# Altium PCB PCB3.PcbDoc
Units mm, origin at the board's own origin, x right, y up, seen from the top; angles counter-clockwise.
Board outline 30 x 22.5 mm, 2 copper layers (Top Layer, Bottom Layer); 20 components, 13 nets, 57 pads, 3 vias.
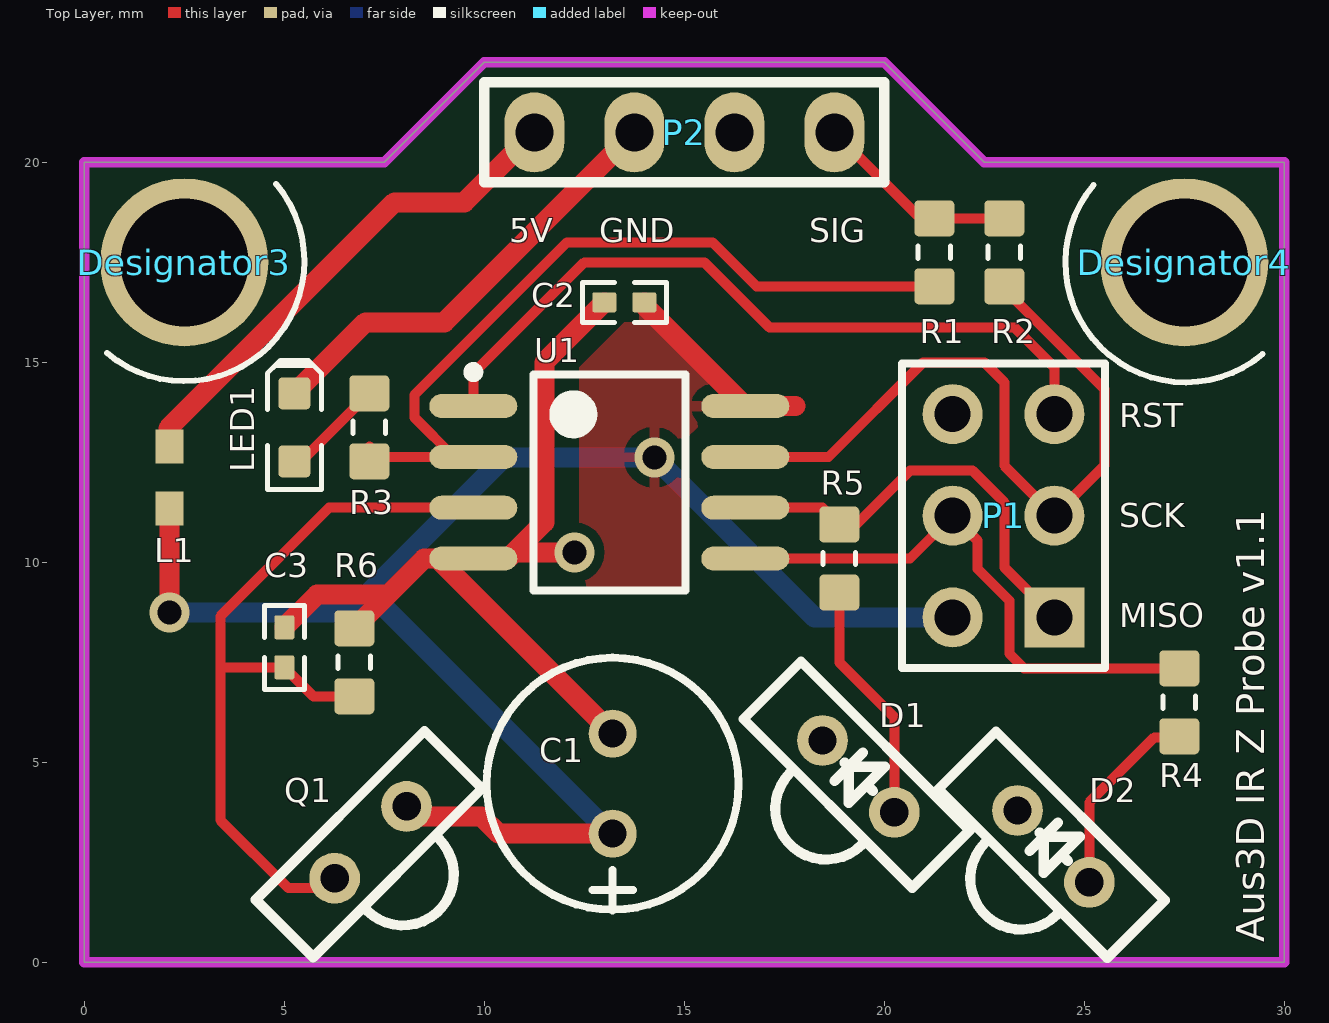
[diagram p0: Top Layer view]
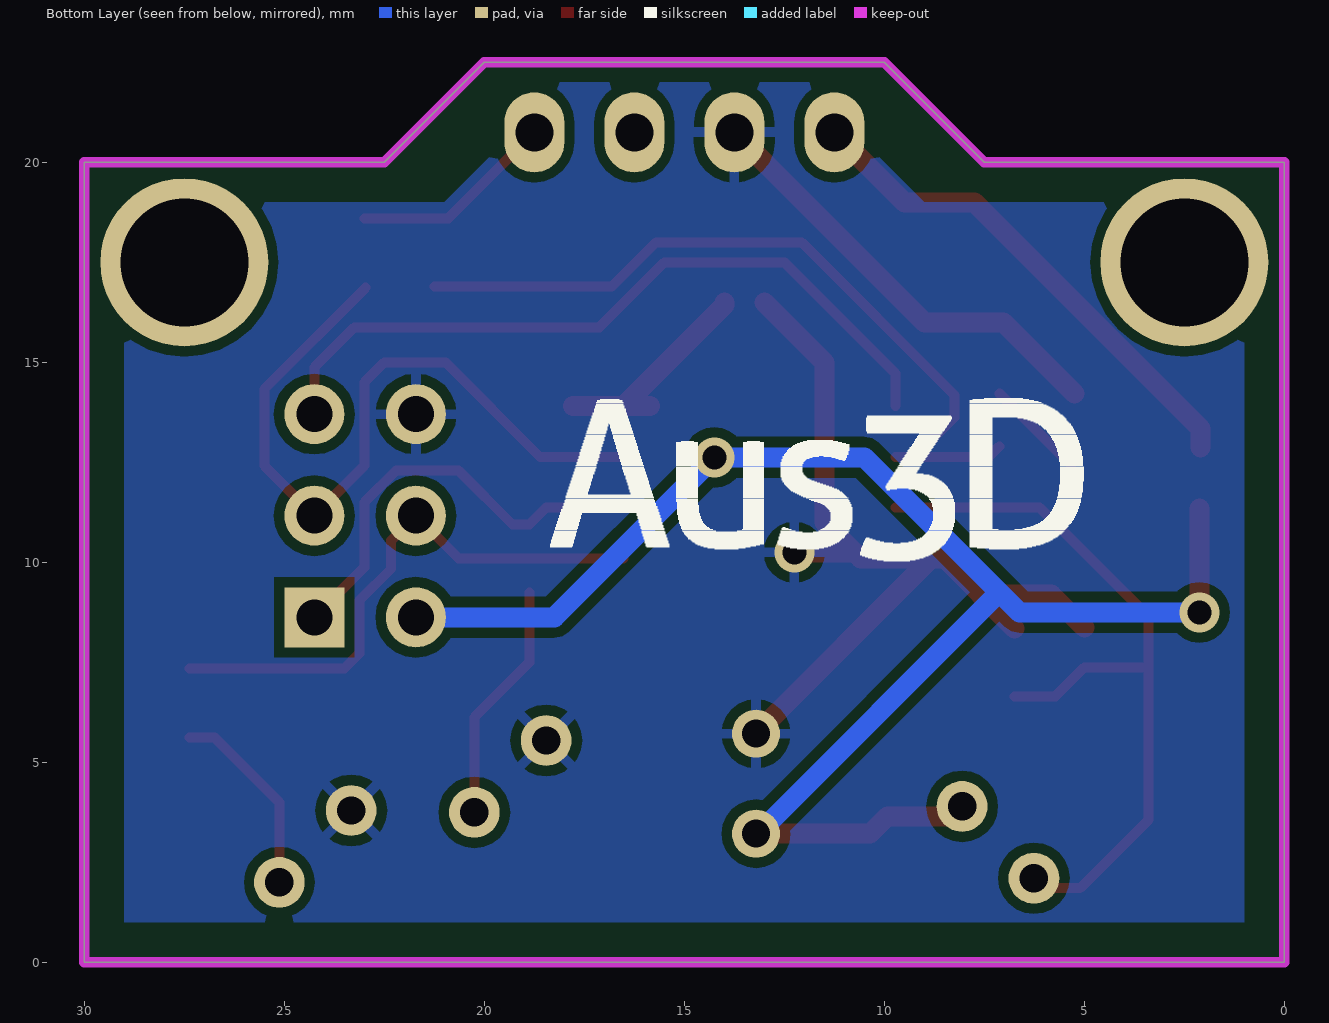
[diagram p1: Bottom Layer view, seen from below]
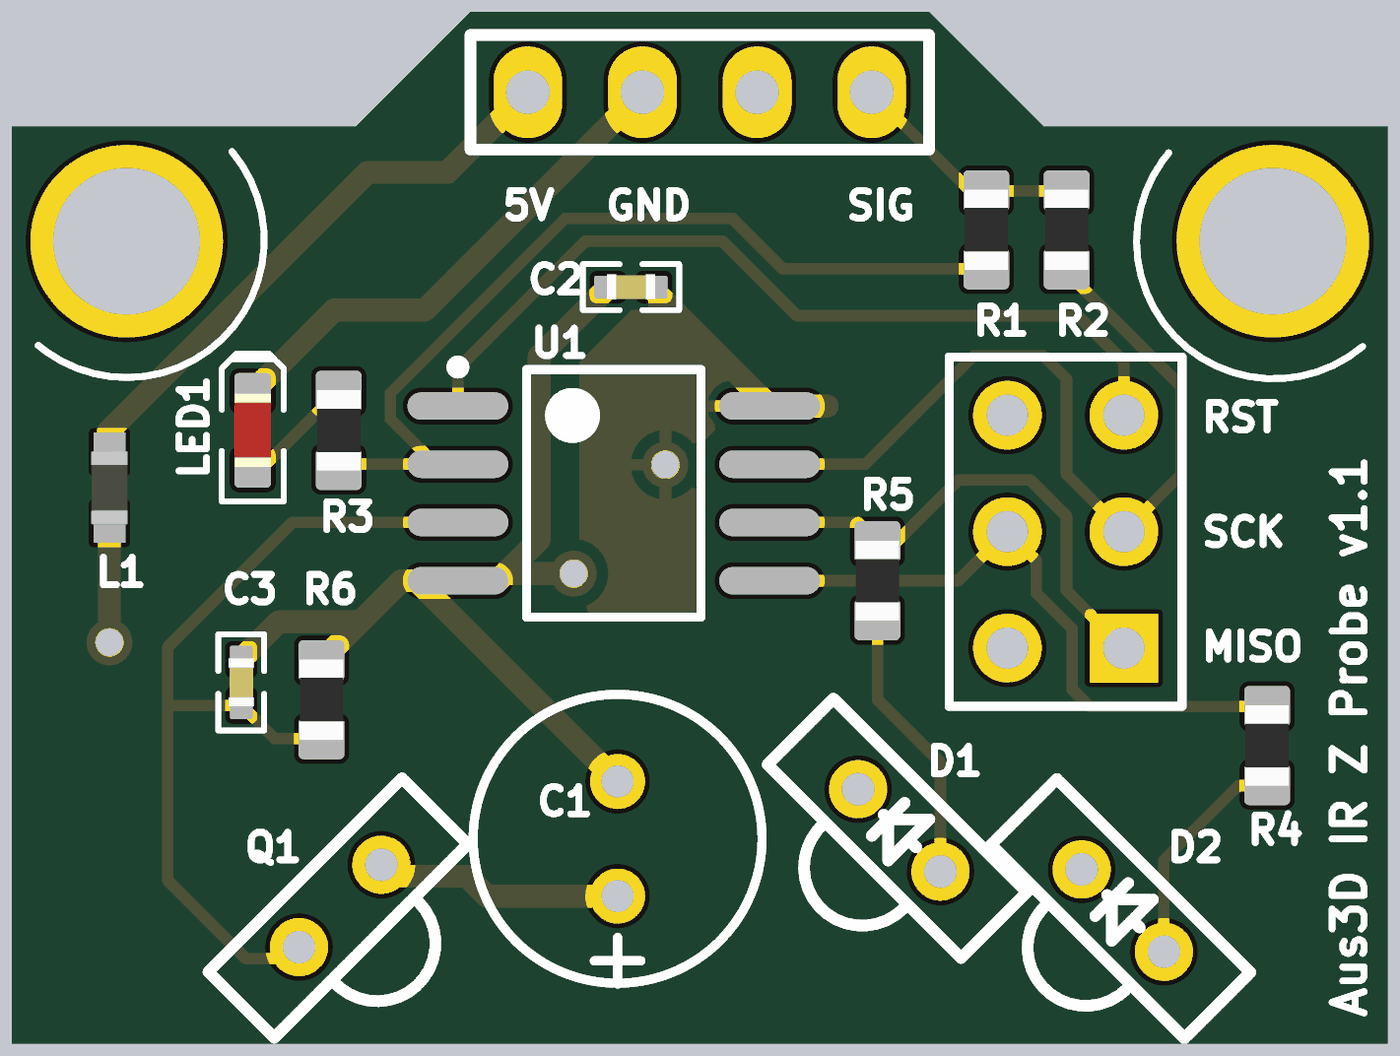
[diagram p2: 3D render of the assembled board from above, using the file's embedded part models]

## Layer stack, top to bottom
Top Solder: solder mask 0.0102, Solder Resist, Dk 3.5
Top Layer: signal copper 0.0356
Dielectric1: dielectric 0.32, FR-4, Dk 4.8
Bottom Layer: signal copper 0.0356
Bottom Solder: solder mask 0.0102, Solder Resist, Dk 3.5

## Board outline
0,0 0,20 7.5,20 10,22.5 20,22.5 22.5,20 30,20 30,0 0,0

## Design rules (kind name [scope] priority, off if disabled: settings)
Clearance [All] p1: gap=0.25
FabricationTestPointUsage TestPointUsage [All] p1: valid=0 allowmultiple=FALSE
FabricationTestpoint Testpoint [All] p1: side=3 testpointundercomponent=TRUE minsize=1.016 maxsize=2.54 preferedsize=1.524 minholesize=0 maxholesize=1.016 preferedholesize=0.813 testpointgrid=0.025 allowsidetop=TRUE allowsidebottom=TRUE usegrid=TRUE gridtolerance=0
PolygonConnect [All] p1: connectstyle=Relief reliefconductorwidth=0.254 reliefentries=4 polygonreliefangle="90 Angle" airgapwidth=0.254
RoutingVias [All] p1: holewidth=0.6 width=1 viastyle="Through Hole" minholewidth=0.6 minwidth=1 maxholewidth=0.6 maxwidth=1
SilkToSolderMaskClearance SilkscreenOverComponentPads [IsPad] p1: minsilkscreentomaskgap=0.254 clearancetoexposedcopper=TRUE
SolderMaskExpansion [All] p1: expansion=0.102
Width Width_Power [(InNet('5V') OR InNet('GND') OR InNet('VCC'))] p1: maxlimit=0.5 minlimit=0.25 preferedwidth=0.5 minimp=50.000000 maximp=50.000000 favimp=50.000000
Width [All] p2: maxlimit=0.25 minlimit=0.2 preferedwidth=0.25 minimp=50.000000 maximp=50.000000 favimp=50.000000
27 further rules are at their usual default settings.

## Classes and differential pairs
component class board1: C1 C2 C3 D1 D2 L1 LED1 P1 P2 Q1 R1 R2 R3 R4 R5 R6 U1

## Components (designator, comment, footprint, x,y, rotation, side; value= is the part's Value field where it differs from the comment)
C1 "100µ" 6.3-DIA-CAP 13.208,5.715 r270 top
C2 "100n" CAPC1005X55N 13.5,16.5 r0 top
C3 "1n" CAPC1005X55N 5,7.875 r90 top
D1 "GL480E" LED-2.54spacing 20.25,3.75 r135 top
D2 "GL480E" LED-2.54spacing 25.125,2 r135 top
Designator3 "Comment" M3-Hole 2.5,17.5 r0 top
Designator4 "Comment" M3-Hole 27.5,17.5 r270 top
L1 "7447965" SMD-0603 2.125,12.125 r270 top
LED1 "Red" LED-0603-RED 5.25,13.375 r90 top
P1 "ICSP" HDR2X3 24.25,8.625 r90 top
P2 "Header 4" JST-4P 18.75,20.75 r180 top
Q1 "SFH3100F" SFH3100F-footprint 8.056,3.898 r225 top
R1 "Thick Film" RESC1608X55N 21.25,17.75 r270 top
R2 "Thick Film" RESC1608X55N 23,17.75 r270 top
R3 "Thick Film" RESC1608X55N 7.125,13.375 r90 top
R4 "Thick Film" RESC1608X55N 27.375,6.5 r90 top
R5 "Thick Film" RESC1608X55N 18.875,10.095 r90 top
R6 "Thick Film" RESC1608X55N 6.75,7.5 r270 top
U1 "ATtiny45-20SH" 8S2_N 13.125,12 r0 top
? "" AUS3D-LOGO-BACK 12,11.875 r0 top

## Footprints (in the part's own frame and the unit in brackets; to place one, negate y for a bottom-side part, rotate by r counter-clockwise, add the part's x,y. Pads: shape width x height; smd on the part's side, far side on the other; paste and mask are expansions set on the pad)
6.3-DIA-CAP [mm]
  round 1.2 hole 0.7: 1(2.5,0) 2(0,0)
  silkscreen extent -1.9,-3.15 4.42,3.15
8S2_N [mm] "SOP, 8-Leads, Body 5.3x5.3mm, Pitch 1.27mm, IPC Medium Density"
  oval 2.2x0.6 smd: 1(-3.4,1.905) 2(-3.4,0.635) 3(-3.4,-0.635) 4(-3.4,-1.905) 5(3.4,-1.905) 6(3.4,-0.635) 7(3.4,0.635) 8(3.4,1.905)
  silkscreen extent -3.52,-2.7 1.9,2.88, body extent -2.7,-2.68 2.7,2.68, height 2.16
AUS3D-LOGO-BACK [mm]
CAPC1005X55N [mm] "Chip Capacitor, Body 1.0x0.5mm, EIA 0402, IPC Medium Density"
  round 0.2 on Mech15: 0(0,0)
  rrect20% 0.6x0.5 smd: 1(-0.5,0) 2(0.5,0)
  Top Layer pour cut-out: -0.325,0.375 -0.2,0.5 0.2,0.5 0.325,0.375 0.325,-0.375 0.2,-0.5 -0.2,-0.5 -0.325,-0.375
  silkscreen extent -1.05,-0.5 1.05,0.5, body extent -0.52,-0.27 0.53,0.28, height 0.55
HDR2X3 [mm] "Connector; Header; 3x2 Position"
  rect 1.5x1.5 hole 0.9: 1(0,0)
  round 1.5 hole 0.9: 2(0,2.54) 3(2.54,0) 4(2.54,2.54) 5(5.08,0) 6(5.08,2.54)
  silkscreen extent -1.27,-1.27 6.35,3.81
JST-4P [mm]
  oval 1.5x2 hole 0.95: 1(0,0) 2(2.5,0) 3(5,0) 4(7.5,0)
  silkscreen extent -1.25,-1.25 8.75,1.25
LED-2.54spacing [mil]
  round 50 hole 28: 1(100,0) 2(0,0)
  silkscreen extent -65,-40 170,95
LED-0603-RED [mm]
  round 0.254 on Mech15: 0(0,0)
  rrect25% 0.8x0.8 smd: A(-0.85,0) K(0.85,0)
  Top Layer pour cut-out: -0.5,0.5 0.5,0.5 0.5,-0.5 -0.5,-0.5
  silkscreen extent -1.55,-0.67 1.68,0.67, body extent -0.8,-0.4 0.8,0.4, height 0.75
M3-Hole [mm]
  round 4.2 hole 3.2: M3(0,0)
  silkscreen extent -1.93,-2.97 3,1.96
RESC1608X55N [mm] "Chip Resistor, Body 1.6x0.8mm, EIA 0603, IPC Medium Density"
  round 0.254 on Mech15: 0(0,0)
  rrect25% 0.9x1 smd: 1(-0.85,0) 2(0.85,0)
  Top Layer pour cut-out: -0.6,0.5 -0.4,0.7 0.4,0.7 0.6,0.5 0.6,-0.5 0.4,-0.7 -0.4,-0.7 -0.6,-0.5
  silkscreen extent -0.15,-0.41 0.15,0.41, body extent -0.87,-0.47 0.88,0.48, height 0.54
SFH3100F-footprint [mil]
  round 50 hole 28: 1(0,0) 2(100,0)
  silkscreen extent -65,-40 170,95
SMD-0603 [mm] "Chip Inductor, 2-Leads, Body 1.6x0.8mm"
  rect 0.85x0.7 smd: 1(-0.775,0) 2(0.775,0)
  body extent -0.8,-0.4 0.8,0.4, height 0.95

## Part data
C1: library part CAPE_100u_16V_THD, "Capacitor THD Electrolytic 100uF 20% 16V Radial"
C2: library part CAPC_100n_0402_X5R_16V_10%, "Capacitor SMD Cer 100nF 10% 16V X5R 0402"
C3: library part CAPC_1n_0402_X7R_16V_10%, "Capacitor SMD Cer 1nF 10% 16V X7R 0402"
L1: "SMD-Multilayer Inductor WE-MI, L = 1.00 µH"
LED1: library part LED_SMD_Red_0603_220mcd, "LED 0603 SMD Hyper Red 630nm 220mcd 20mA"
P1: library part "Header 3X2", "Header, 3-Pin, Dual row"
P2: "Header, 4-Pin"
Q1: "GL480E"
R1 R2 R4 R5 R6: library part RES_2K2_0603_5%, "Resistor SMD chip 2.2k Ohm 0.1W 5% 0603"
R3: library part RES_330R_0603_5%, "Resistor SMD chip 330 Ohm 0.1W 5% 0603"
U1: "8-bit AVR Microcontroller, 20MHz, 2.7-5.5V, 4K Flash, 256 Bytes EEPROM, 256 Bytes SRAM, Industrial Grade (-40°C to 85°C), 8-Lead SOIC, Pb-Free"

## Via types
v1: diameter 1, hole 0.6, Top Layer to Bottom Layer, tented both sides, 3 vias

## Nets (pads, with @x,y where several pads share a name; then routed paths per layer and width w, separated by ;. In a path a pad name is that pad's centre, name@x,y a point inside that pad or via, vN(x,y) a via of type N, cw(c..) or ccw(c..) an arc to the next point about the centre after c; other vN are vias at no path point)
5V: C1.1 C2.2 L1.2 P1.2 Q1.1 U1.8 | length 44.7
  Top Layer w0.5: v1(2.125,8.75) L1.2 ; Q1.1@8.306,3.648 9.924,3.648 10.357,3.215 C1.1 ; C2.2 14,16.43 U1.8 ; U1.8@15.864,13.905 U1.8 ; 17.78,13.905 U1.8 ; P1.2 P1.2@21.75,8.585
  Bottom Layer w0.5: v1(2.125,8.75) 6.625,8.75 7.125,9.25 ; C1.1 13.16,3.215 7.125,9.25 ; P1.2 18.25,8.625 v1(14.25,12.625) 10.5,12.625 7.125,9.25
GND: C1.2 C2.1 C3.2 D1.1 D2.1 LED1.K P1.6 P2.3 R6.1 U1.4 | length 33.8
  Top Layer w0.5: C3.2 5.823,9.198 7.598,9.198 ; LED1.K 7.025,16 9,16 P2.3 ; R6.1 8.495,10.095 U1.4 10.595,10.095 U1.4@10.75,10.25 ; U1.4@8.836,10.087 C1.2 ; v1(12.25,10.25) U1.4@10.75,10.25 ; C2.1 11.5,15 11.5,11 U1.4@10.75,10.25
NetC3_1: C3.1 Q1.2 R6.2 U1.3 | length 20
  Top Layer w0.25: Q1.2@6.51,1.852 5.102,1.852 3.4,3.554 3.4,7.375 ; R6.2 5.725,6.65 C3.1 3.4,7.375 ; U1.3 6.115,11.365 3.4,8.65 3.4,7.375
NetD1_2: D1.2 R5.1 | length 6.1
  Top Layer w0.25: R5.1 18.875,7.5 20.25,6.125 D1.2
NetD2_2: D2.2 R4.1 | length 4.9
  Top Layer w0.25: D2.2 25.125,4 26.75,5.625 R4.1@27.375,5.625
NetLED1_A: LED1.A R3.2 | length 2.6
  Top Layer w0.25: LED1.A 5.425,12.525 R3.2
NetP1_1: P1.1 R5.2 U1.6 | length 10.9
  Top Layer w0.25: U1.6 18.455,11.365 R5.2 19.297,10.945 20.642,12.29 22.21,12.29 23,11.5 23,9.875 P1.1
NetP1_3: P1.3 R2.2 U1.7 | length 18.8
  Top Layer w0.25: U1.7 18.606,12.635 20.971,15 22.5,15 23,14.5 23,12.415 P1.3 25.5,12.415 25.5,14.332 R2.2@22.966,16.866
NetP1_4: P1.4 R4.2 U1.5 | length 14.1
  Top Layer w0.25: U1.5 20.64,10.095 P1.4 22.335,10.54 22.335,9.833 23.125,9.043 23.125,7.72 23.495,7.35 R4.2
NetP1_5: P1.5 U1.1 | length 18.8
  Top Layer w0.25: U1.1 9.725,14.725 12.5,17.5 15.5,17.5 17.125,15.875 23.25,15.875 24.25,14.875 P1.5
NetR1_2: R1.2 R3.1 U1.2 | length 19.7
  Top Layer w0.25: R3.1@7.125,12.9 7.39,12.635 U1.2@9.24,12.635 ; U1.2 U1.2@9.24,12.635 ; R1.2 16.807,16.9 15.707,18 12.065,18 8.25,14.185 8.25,13.625 U1.2@9.24,12.635
SIG: P2.1 R1.1 R2.1 | length 5.1
  Top Layer w0.25: P2.1 20.9,18.6 R1.1 R2.1
VCC: L1.1 P2.4 | length 12.7
  Top Layer w0.5: L1.1@2.1,12.875 2.1,13.35 7.75,19 9.5,19 P2.4
pads on no net: C2.0 C3.0 Designator3.M3 Designator4.M3 LED1.0 P2.2 R1.0 R2.0 R3.0 R4.0 R5.0 R6.0

## Polygon pours and split planes (outlines as drawn)
GND on Bottom Layer "GND - BottomLayer" (solid, pour order 2): 1,19 1,1 29,1 29,19 21,19 19,21 19,22 11,22 11,21 9,19 1,19
5V on Top Layer "VCC - TopLayer" (solid, remove dead copper, pour order 4): 14,16.5 12.375,14.875 12.375,11.375 12.375,9.375 15,9.375 15,13.041 15.864,13.905 15.875,13.916 15.875,14.75 15.875,14.875 14.125,16.625

## Keep-outs
Keep-Out Layer:
  the board outline again, w0.254

## Silkscreen, mask and mechanical layers (free items; w line width, h text height)
Top Overlay:
  text "5V" at 10.625,18 h0.6
  text "GND" at 12.875,18 h0.6
  text "SIG" at 18.125,18 h0.6
  text "RST" at 25.875,13.375 h0.6
  text "SCK" at 25.875,10.875 h0.6
  text "MISO" at 25.875,8.375 h0.6
  text "Aus3D IR Z Probe v1.1" at 29.5,0.5 h0.7 r90
Mechanical 16:
  drawing of 1874 lines, arcs and shapes, not listed
  text "1" at -98.129,99.611 h0.6
  text "2" at -25.485,99.611 h0.6
  text "3" at 47.667,99.611 h0.6
  text "4" at 120.565,99.611 h0.6
  text "A" at -132.47,76.599 h0.6
  text "A" at 154.55,76.599 h0.6
  text "B" at -132.47,28.542 h0.6
  text "B" at 154.55,28.542 h0.6
  text "C" at -132.47,-19.972 h0.6
  text "C" at 154.55,-19.972 h0.6
  text "ENGINEER:" at 39.615,-56.98 h0.6
  text "TITLE:" at 77.715,-56.98 h0.6
  text "PCB DESIGNER:" at 39.615,-64.473 h0.6
  text "D" at -132.47,-67.978 h0.6
  text "D" at 154.55,-67.978 h0.6
  text "DATE:" at 39.615,-72.22 h0.6
  text "PART NO.:" at 77.715,-72.22 h0.6
  text "REV:" at 131.055,-72.22 h0.6
  text "Altium Limited" at 6.595,-74.76 h0.6
  text ".PRINT_DATE" at 40.885,-75.268 h0.6
  text "12a Rodborough Rd" at 6.595,-77.3 h0.6
  text "Frenchs Forest" at 6.595,-79.84 h0.6
  text "FILE NAME:" at 39.615,-79.84 h0.6
  text "DWG NO:" at 77.715,-79.84 h0.6
  text "SCALE:" at 131.055,-79.84 h0.6
  text "NSW 2086" at 6.595,-82.38 h0.6
  text ".PCB_FILE_NAME_NO_PATH" at 40.885,-82.888 h0.6
  text "1" at -98.129,-88.349 h0.6
  text "2" at -25.485,-88.349 h0.6
  text "3" at 47.667,-88.349 h0.6
  text "4" at 120.565,-88.349 h0.6